# EAGLE board interface (EAGLE 6.2)
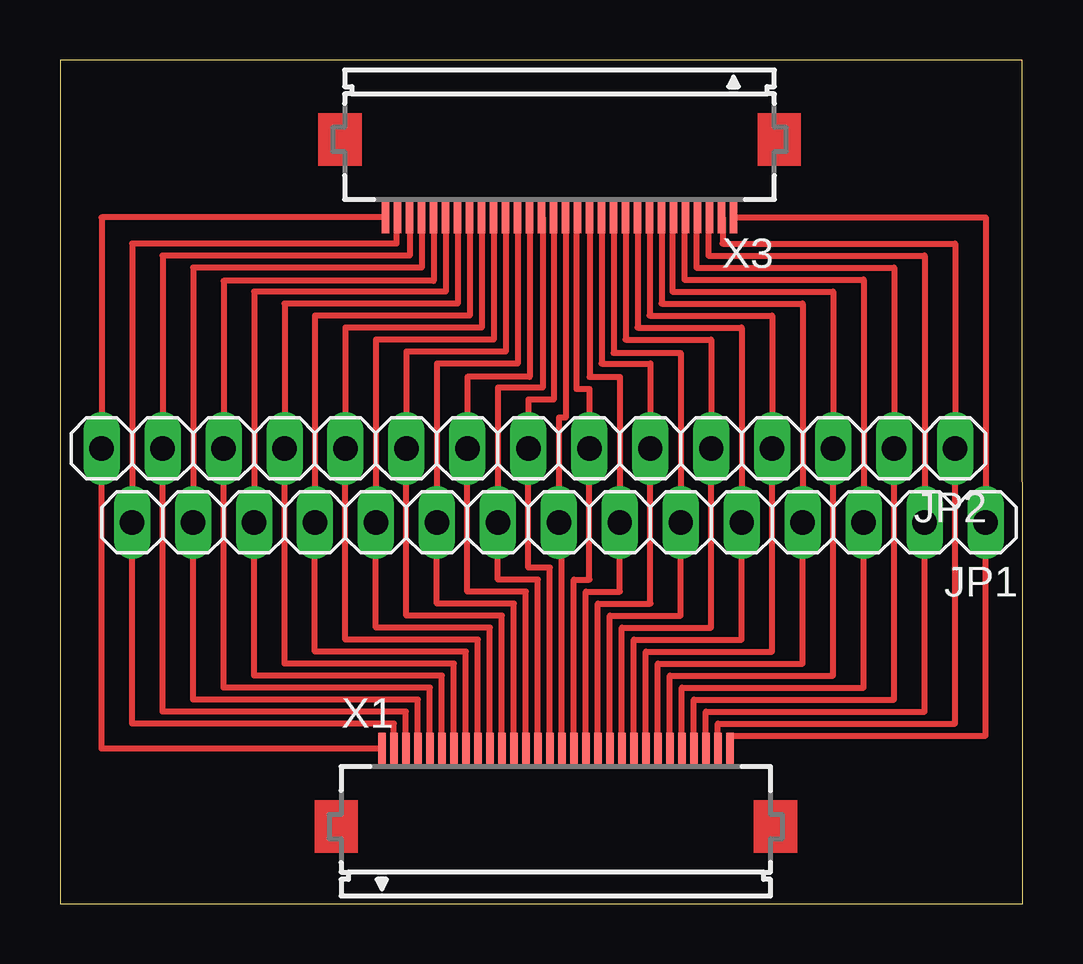
[diagram p0: board, top side]

Size 40.11 x 35.15 mm. Coordinates in mm from the lower left corner, seen from the top.
Outline: 0.01,0 40.11,0 40.1,35.15 0,35.15 0.01,0
Copper layers (1*16): Top 0.0356mm / dielectric 1.5011mm / Bottom 0.0356mm
Design rules: minimum track width 6mil, minimum drill 13mil, track to track 6mil, track to pad 6mil, pad to pad 6mil, via to via 6mil, smd to smd 6mil, copper to edge 15mil, drill to drill 6mil, minimum pad ring 7mil, minimum via ring 7mil, stop-mask expansion 4mil, vias tented up to drill 0mil, thermal gap 10mil

## Footprints (pad centres in the part's own frame; a part is rotated, then mirrored left to right if it is on the bottom)
1X15 = drill 1.016 long: 1 -17.78,0; 2 -15.24,0; 3 -12.7,0; 4 -10.16,0; 5 -7.62,0; 6 -5.08,0; 7 -2.54,0; 8 0,0; 9 2.54,0; 10 5.08,0; 11 7.62,0; 12 10.16,0; 13 12.7,0; 14 15.24,0; 15 17.78,0
FH12-30S-0.5SH = smd 0.3 x 1.3: 1 -7.25,3.25; 2 -6.75,3.25; 3 -6.25,3.25; 4 -5.75,3.25; 5 -5.25,3.25; 6 -4.75,3.25; 7 -4.25,3.25; 8 -3.75,3.25; 9 -3.25,3.25; 10 -2.75,3.25; 11 -2.25,3.25; 12 -1.75,3.25; 13 -1.25,3.25; 14 -0.75,3.25; 15 -0.25,3.25; 16 0.25,3.25; 17 0.75,3.25; 18 1.25,3.25; 19 1.75,3.25; 20 2.25,3.25; 21 2.75,3.25; 22 3.25,3.25; 23 3.75,3.25; 24 4.25,3.25; 25 4.75,3.25; 26 5.25,3.25; 27 5.75,3.25; 28 6.25,3.25; 29 6.75,3.25; 30 7.25,3.25

## Placement (x,y rotation side)
JP1  [1X15]  20.78,15.88 180 top
JP2  [1X15]  19.51,18.97 180 top
X1  FH12-30S-0.5SH  [FH12-30S-0.5SH]  20.66,3.21 0 top
X3  FH12-30S-0.5SH  [FH12-30S-0.5SH]  20.81,31.84 180 top

## Library data of the parts
JP1 JP2 = pinhead
X1 X3 = con-hirose; MPN: FH12-30S-0.5SH(55); OC_FARNELL: 1324555; OC_NEWARK: 34M6176

## Nets
N$1: JP1.1 X1.30 X3.1
N$2: JP2.1 X1.29 X3.2
N$4: JP2.2 X1.27 X3.4
N$5: JP1.3 X1.26 X3.5
N$6: JP2.3 X1.25 X3.6
N$7: JP1.4 X1.24 X3.7
N$8: JP2.10 X1.11 X3.20
N$10: JP2.11 X1.9 X3.22
N$11: JP2.12 X1.7 X3.24
N$12: JP2.4 X1.23 X3.8
N$13: JP1.5 X1.22 X3.9
N$14: JP2.5 X1.21 X3.10
N$15: JP1.6 X1.20 X3.11
N$16: JP2.6 X1.19 X3.12
N$17: JP1.7 X1.18 X3.13
N$18: JP2.7 X1.17 X3.14
N$19: JP1.8 X1.16 X3.15
N$20: JP2.8 X1.15 X3.16
N$21: JP1.9 X1.14 X3.17
N$22: JP1.2 X1.28 X3.3
N$25: JP1.11 X1.10 X3.21
N$27: JP1.12 X1.8 X3.23
N$29: JP1.13 X1.6 X3.25
N$30: JP2.13 X1.5 X3.26
N$31: JP1.14 X1.4 X3.27
N$33: JP1.15 X1.2 X3.29
N$34: JP2.15 X1.1 X3.30
N$36: JP1.10 X1.12 X3.19
N$37: JP2.14 X1.3 X3.28
N$38: JP2.9 X1.13 X3.18

## Tracks (layer width: path | path; a pad name or v marks a point on that pad's centre or on a via)
N$1
  Top 0.254: X1.30 27.91,7 38.56,7 JP1.1 38.56,28.59 X3.1
N$2
  Top 0.254: X1.29 27.41,7.5 37.29,7.5 JP2.1 37.29,27.5 27.61,27.5 27.61,28.59 X3.2
N$4
  Top 0.254: X1.27 26.41,8.5 34.75,8.5 JP2.2 34.75,26.5 26.51,26.5 26.51,28.59 X3.4
N$5
  Top 0.254: X1.26 25.91,9 33.48,9 JP1.3 33.48,26 26.01,26 26.01,28.59 X3.5
N$6
  Top 0.254: X1.25 25.41,9.5 32.21,9.5 JP2.3 32.21,25.5 25.51,25.5 25.51,28.59 X3.6
N$7
  Top 0.254: X1.24 24.91,10 30.94,10 JP1.4 30.94,25 25.06,25 X3.7
N$8
  Top 0.254: X1.11 18.41,12 14.43,12 JP2.10 14.43,23 18.56,23 X3.20
N$10
  Top 0.254: X1.9 17.41,11 11.89,11 JP2.11 11.89,24 17.56,24 X3.22
N$11
  Top 0.254: X1.7 16.41,10 9.35,10 JP2.12 9.35,25 16.56,25 X3.24
N$12
  Top 0.254: X1.23 24.41,10.5 29.67,10.5 JP2.4 29.67,24.5 24.56,24.5 X3.8
N$13
  Top 0.254: X1.22 23.91,11 28.4,11 JP1.5 28.4,24 24.06,24 X3.9
N$14
  Top 0.254: X1.21 23.41,11.5 27.13,11.5 JP2.5 27.13,23.5 23.56,23.5 X3.10
N$15
  Top 0.254: X1.20 22.91,12 25.86,12 JP1.6 25.86,22.95 23.06,22.95 X3.11
N$16
  Top 0.254: X1.19 22.41,12.5 24.59,12.5 JP2.6 24.59,22.5 22.56,22.5 X3.12
N$17
  Top 0.254: X1.18 21.91,13 23.32,13 JP1.7 23.32,21.95 22.06,21.95 X3.13
N$18
  Top 0.254: X1.17 21.41,13.5 22.05,13.5 JP2.7 22.05,21.45 21.51,21.45 21.51,28.59 X3.14
N$19
  Top 0.254: X1.16 20.91,15.1 20.78,15.1 JP1.8 20.78,20.25 21.06,20.25 X3.15
N$20
  Top 0.254: X1.15 20.41,14 19.51,14 JP2.8 19.51,21 20.56,21 X3.16
N$21
  Top 0.254: X1.14 19.91,13.5 18.24,13.5 JP1.9 18.24,21.5 20.11,21.5 20.11,28.59 X3.17
N$22
  Top 0.254: X1.28 26.91,8 36.02,8 JP1.2 36.02,27 27.01,27 27.01,28.59 X3.3
N$25
  Top 0.254: X1.10 17.91,11.5 13.16,11.5 JP1.11 13.16,23.5 18.06,23.5 X3.21
N$27
  Top 0.254: X1.8 16.91,10.5 10.62,10.5 JP1.12 10.62,24.5 17.06,24.5 X3.23
N$29
  Top 0.254: X1.6 15.91,9.5 8.08,9.5 JP1.13 8.08,25.5 16.06,25.5 X3.25
N$30
  Top 0.254: X1.5 15.41,9 6.81,9 JP2.13 6.81,25.95 15.56,25.95 X3.26
N$31
  Top 0.254: X1.4 14.91,8.5 5.54,8.5 JP1.14 5.54,26.5 15.06,26.5 X3.27
N$33
  Top 0.254: X1.2 13.91,7.5 3,7.5 JP1.15 3,27.5 14.01,27.5 14.01,28.59 X3.29
N$34
  Top 0.254: X1.1 1.73,6.46 JP2.15 1.73,28.59 X3.30
N$36
  Top 0.254: X1.12 18.91,12.5 15.7,12.5 JP1.10 15.7,22.5 19.06,22.5 X3.19
N$37
  Top 0.254: X1.3 14.41,8 4.27,8 JP2.14 4.27,27 14.56,27 X3.28
N$38
  Top 0.254: X1.13 19.41,13 16.97,13 JP2.9 16.97,21.95 19.56,21.95 X3.18